# EAGLE board juggling_ballsch_2 (EAGLE 6.5.0)
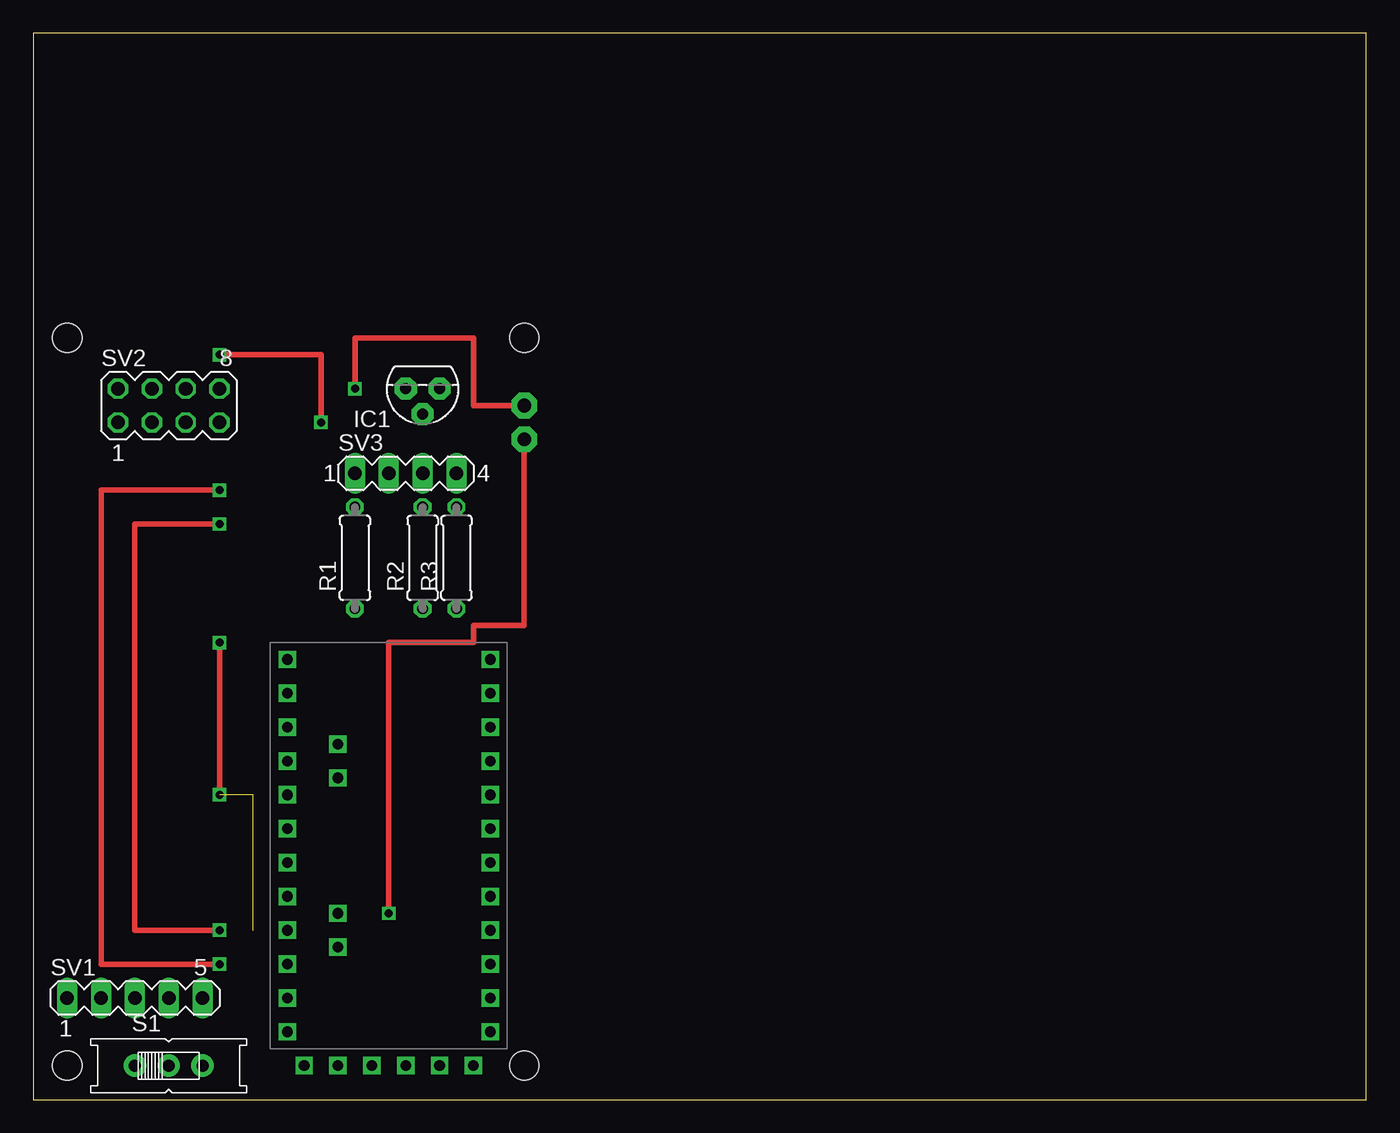
[diagram p0: board, top side]
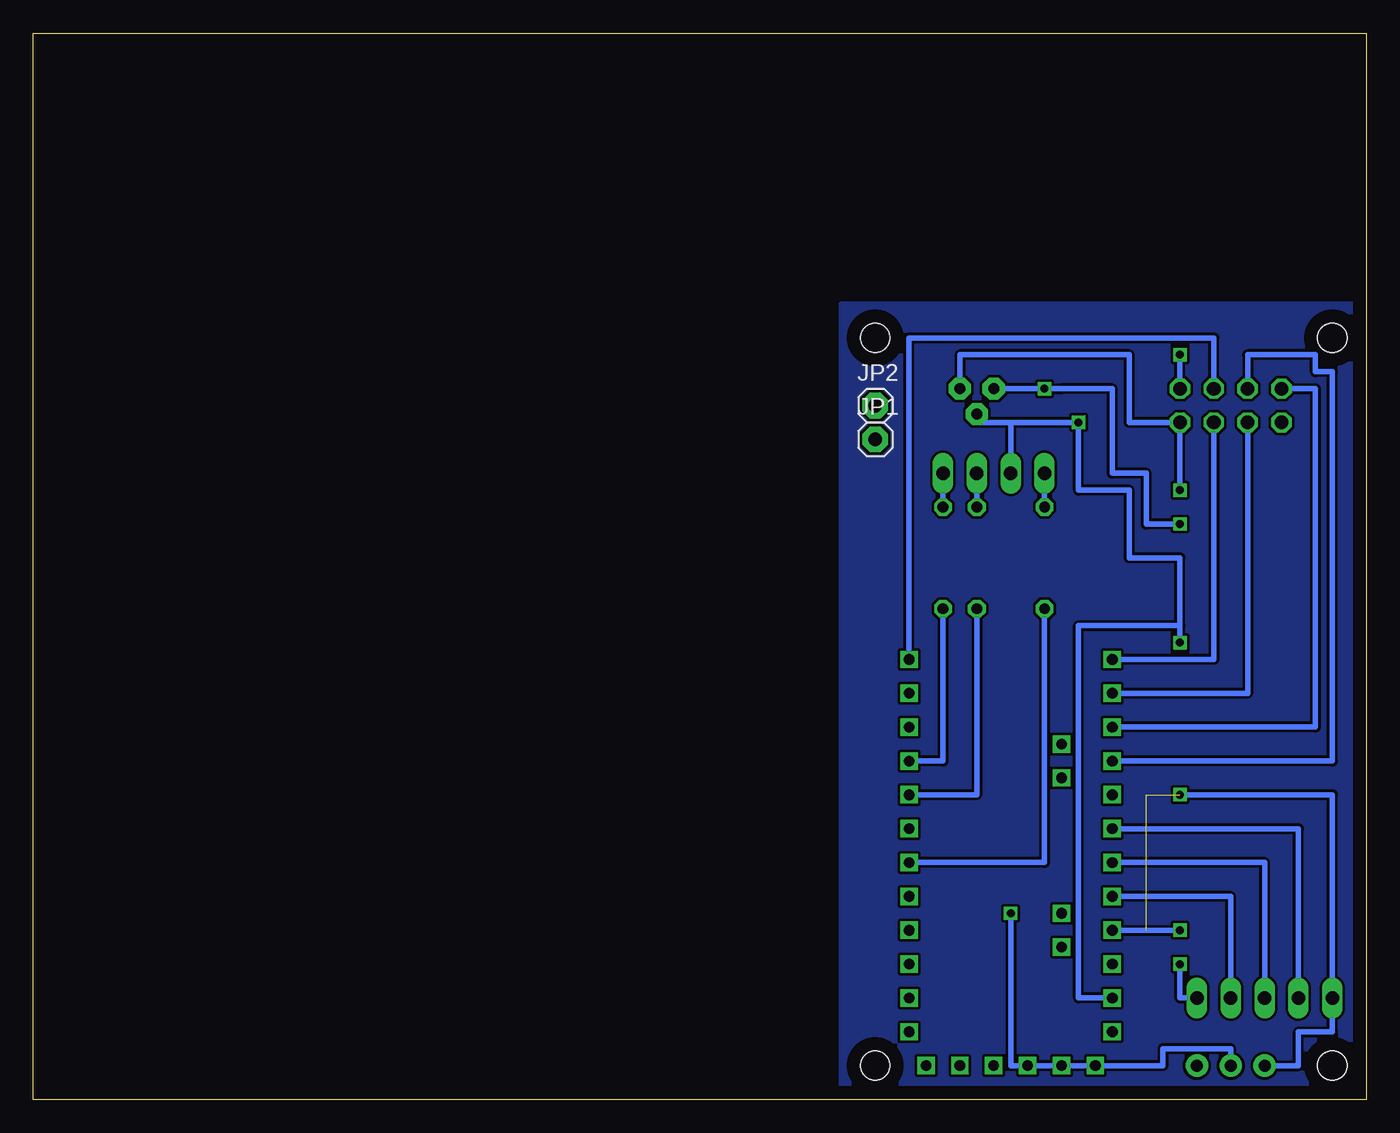
[diagram p1: board, bottom side, seen from below]

Size 100 x 80 mm. Coordinates in mm from the lower left corner, seen from the top.
Outline: 0,0 100,0 100,80 0,80 0,0
Copper layers (1*16): Top 0.035mm / dielectric 1.5mm / Bottom 0.035mm
Design rules "default": minimum track width 10mil, minimum drill 24mil, track to track 8mil, track to pad 8mil, pad to pad 8mil, via to via 8mil, smd to smd 8mil, copper to edge 40mil, drill to drill 8mil, minimum pad ring 10mil, minimum via ring 8mil, stop-mask expansion 4mil, vias tented up to drill 0mil, thermal gap 10mil
Holes 2.2 mm at 36.83,57.15 2.54,57.15 36.83,2.54 2.54,2.54

## Footprints (pad centres in the part's own frame; a part is rotated, then mirrored left to right if it is on the bottom)
TO92 = drill 0.813 pad 1.676 octagon: 1 -1.27,0; 2 0,1.905; 3 1.27,0
1X01 = drill 1.016 pad 1.93 octagon: 1 0,0
0207/7 = drill 0.813 octagon: 1 -3.81,0; 2 3.81,0
EG1218 = drill 0.9 pad 1.676: O -2.54,0; P 0,0; S 2.54,0
MA05-1 = drill 1.016 long: 1 -5.08,0; 2 -2.54,0; 3 0,0; 4 2.54,0; 5 5.08,0
MA04-2 = drill 1.016 octagon: 1 -3.81,-1.27; 2 -3.81,1.27; 3 -1.27,-1.27; 4 -1.27,1.27; 5 1.27,-1.27; 6 1.27,1.27; 7 3.81,-1.27; 8 3.81,1.27
MA04-1 = drill 1.016 long: 1 -3.81,0; 2 -1.27,0; 3 1.27,0; 4 3.81,0
ARDMINIPRO = drill 0.8 square: _5V -1.27,16.51; _CTS -3.81,16.51; _DTR 6.35,16.51; _GND -6.35,16.51; _RX 3.81,16.51; _TX 1.27,16.51; A0 7.62,-3.81; A1 7.62,-1.27; A2 7.62,1.27; A3 7.62,3.81; A4 3.81,5.08; A5 3.81,7.62; A6 3.81,-7.62; A7 3.81,-5.08; D2 -7.62,3.81; D3 -7.62,1.27; D4 -7.62,-1.27; D5 -7.62,-3.81; D6 -7.62,-6.35; D7 -7.62,-8.89; D8 -7.62,-11.43; D9 -7.62,-13.97; D10 7.62,-13.97; GND -7.62,6.35; GND2 7.62,11.43; MISO 7.62,-8.89; MOSI 7.62,-11.43; RAW 7.62,13.97; RESET -7.62,8.89; RESET3 7.62,8.89; RX -7.62,11.43; SCK 7.62,-6.35; TX -7.62,13.97; VCC 7.62,6.35

## Placement (x,y rotation side)
IC1  78L08Z  [TO92]  29.21,53.34 180 top
JP1  [1X01]  36.83,49.53 0 bottom
JP2  [1X01]  36.83,52.07 0 bottom
R1  [0207/7]  24.13,40.64 90 top
R2  [0207/7]  29.21,40.64 90 top
R3  [0207/7]  31.75,40.64 90 top
S1  [EG1218]  10.16,2.54 0 top
SV1  [MA05-1]  7.62,7.62 0 top
SV2  [MA04-2]  10.16,52.07 0 top
SV3  [MA04-1]  27.94,46.99 0 top
U$1  ARDMINIPRO  [ARDMINIPRO]  26.67,19.05 180 top

## Library data of the parts
IC1 JP1 JP2 S1 = adafruit
R1-R3 = resistor
SV1-SV3 = con-lstb; OC_FARNELL: unknown; OC_NEWARK: unknown
U$1 = Charlie

## Nets
N$1: SV1.2 U$1.A1
N$2: SV1.3 U$1.A2
N$3: SV1.4 U$1.A3
N$4: IC1.2 S1.O SV1.1 SV2.8 SV3.2 U$1.GND2
N$5: SV2.3 U$1.MOSI
N$6: SV2.5 U$1.D10
N$7: SV2.2 U$1.MISO
N$8: SV2.6 U$1.D9
N$9: SV2.4 U$1.SCK
N$11: IC1.1 SV1.5 SV2.7
N$13: R1.1 U$1.D3
N$14: R2.1 U$1.D5
N$15: R3.1 U$1.D6
N$16: R1.2 SV3.1
N$17: R2.2 SV3.3
N$18: R3.2 SV3.4
N$19: JP1.1 S1.P
N$20: IC1.3 JP2.1 U$1.VCC

## Tracks (layer width: path | path; a pad name or v marks a point on that pad's centre or on a via)
N$1
  Bottom 0.406: SV1.2 5.08,20.32 U$1.A1
N$2
  Bottom 0.406: SV1.3 7.62,17.78 U$1.A2
N$3
  Bottom 0.406: SV1.4 10.16,15.24 U$1.A3
N$4  (via drill 0.6)  (2 unrouted)
  Top 0.406: v13.97,55.88 21.59,55.88 v21.59,50.8 | v13.97,22.86 v13.97,34.29
  Bottom 0.406: SV2.8 v13.97,55.88 | 26.67,50.8 v21.59,50.8 21.59,45.72 17.78,45.72 17.78,40.64 13.97,40.64 13.97,35.56 | 26.67,50.8 29.21,50.8 IC1.2 | 13.97,35.56 21.59,35.56 21.59,7.62 U$1.GND2 | SV3.2 26.67,50.8 | v13.97,22.86 2.54,22.86 SV1.1 2.54,5.08 5.08,5.08 5.08,2.54 S1.O | v13.97,34.29 13.97,35.56
N$5
  Bottom 0.406: SV2.3 8.89,30.48 U$1.MOSI
N$6
  Bottom 0.406: SV2.5 11.43,33.02 U$1.D10
N$7
  Bottom 0.406: SV2.2 3.81,53.34 3.81,27.94 U$1.MISO
N$8
  Bottom 0.406: SV2.6 11.43,57.15 34.29,57.15 U$1.D9
N$9
  Bottom 0.406: U$1.SCK 2.54,25.4 2.54,54.61 3.81,54.61 3.81,55.88 8.89,55.88 SV2.4
N$10
  pour Bottom: 0,0 0,40.64 0,59.69 39.37,59.69 39.37,0
N$11  (via drill 0.6)
  Top 0.406: v13.97,10.16 5.08,10.16 5.08,45.72 v13.97,45.72
  Bottom 0.406: IC1.1 30.48,55.88 17.78,55.88 17.78,50.8 SV2.7 v13.97,45.72 | v13.97,10.16 13.97,7.62 SV1.5
N$13
  Bottom 0.406: R1.1 24.13,17.78 U$1.D3
N$14
  Bottom 0.406: R2.1 29.21,22.86 U$1.D5
N$15
  Bottom 0.406: R3.1 31.75,25.4 U$1.D6
N$16
  Bottom 0.406: R1.2 SV3.1
N$17
  Bottom 0.406: R2.2 SV3.3
N$18
  Bottom 0.406: R3.2 SV3.4
N$19  (via drill 0.6)
  Top 0.406: JP1.1 36.83,35.56 33.02,35.56 33.02,34.29 26.67,34.29 v26.67,13.97
  Bottom 0.406: v26.67,13.97 26.67,2.54 15.24,2.54 15.24,3.81 10.16,3.81 S1.P
N$20  (via drill 0.6)
  Top 0.406: v13.97,12.7 7.62,12.7 7.62,43.18 v13.97,43.18 | JP2.1 33.02,52.07 33.02,57.15 24.13,57.15 v24.13,53.34
  Bottom 0.406: U$1.VCC v13.97,12.7 | v13.97,43.18 16.51,43.18 16.51,46.99 19.05,46.99 19.05,53.34 22.86,53.34 v24.13,53.34 IC1.3